# EAGLE board ws2812_Triangle_V04 (EAGLE 7.7.0)
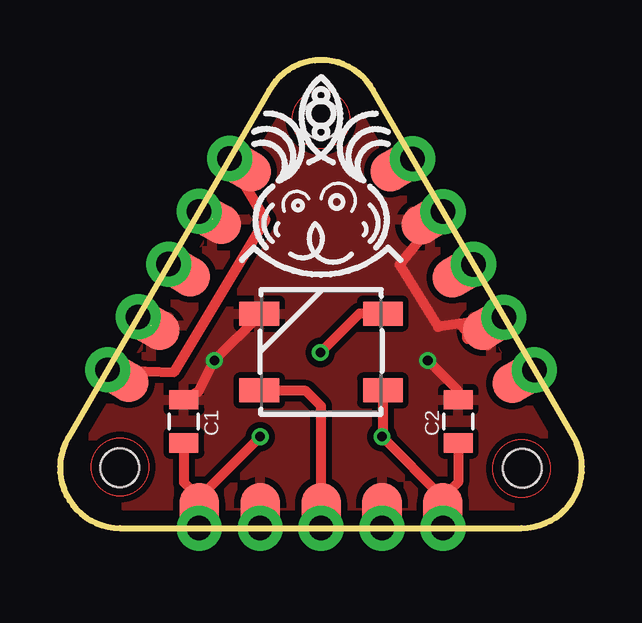
[diagram p0: board, top side]
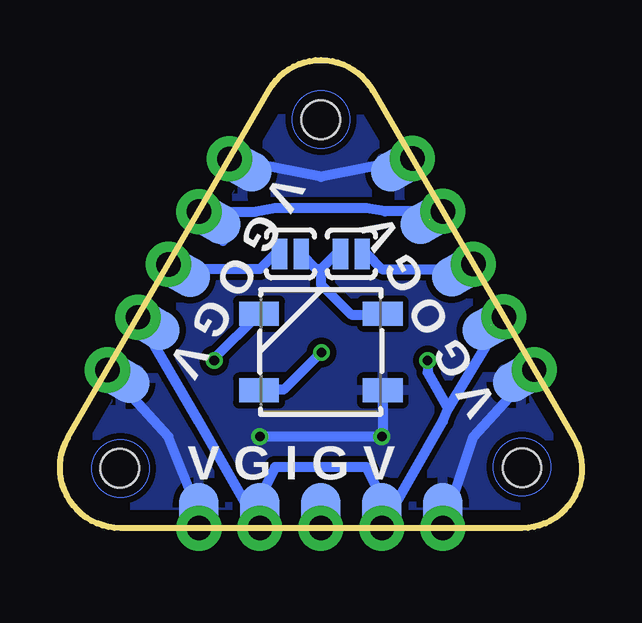
[diagram p1: board, bottom side, seen from below]

Size 21.75 x 19.5 mm. Coordinates in mm from the lower left corner, seen from the top.
Outline: 2.5,0 19.23,0 arc120 21.42,3.76 13.04,18.26 arc121 8.72,18.24 0.34,3.76 arc120 2.5,0
Copper layers (1*16): Top 0.035mm / dielectric 1.5mm / Bottom 0.035mm
Design rules "SeeedStudio_2layer_DRU_no_angle_20140221": minimum track width 6mil, minimum drill 12mil, track to track 6mil, track to pad 6mil, pad to pad 6mil, via to via 6mil, smd to smd 0mil, copper to edge 10mil, drill to drill 10mil, minimum pad ring 10mil, minimum via ring 6mil, stop-mask expansion 2mil, vias tented up to drill 100mil, thermal gap 10mil
Holes 1.6 mm at 2.5,2.51 10.88,17.02 19.26,2.49

## Footprints (pad centres in the part's own frame; a part is rotated, then mirrored left to right if it is on the bottom)
0805 = smd 0.8 x 1.2: 1 -0.9,0; 2 0.9,0
WS2812B = smd 1.651 x 1: 1 -2.577,1.6; 2 -2.577,-1.6; 3 2.577,-1.6; 4 2.577,1.6
1X05_NO_SILK = drill 1.016 pad 1.88: 1 0,0; 2 2.54,0; 3 5.08,0; 4 7.62,0; 5 10.16,0
PAD-JUMPER-2-NO_YES_SILK = smd 0.635 x 1.27: 1 -0.45,0; 2 0.45,0
SMD_PTH_1.65 = smd 1.65 x 2.5: P$1 0,0.635

## Placement (x,y rotation side)
C1  0.1uF  [0805]  5.16,4.45 270 top
C2  0.1uF  [0805]  16.59,4.45 270 top
D1  [WS2812B]  10.88,7.34 180 top
D2  [WS2812B]  10.88,7.34 180 bottom
J1  [1X05_NO_SILK]  7.07,15.4 240 top
J2  [1X05_NO_SILK]  19.77,6.59 120 top
J3  [1X05_NO_SILK]  5.8,0 0 top
JP1  JUMPER-PAD-2-NOYES_SILK  [PAD-JUMPER-2-NO_YES_SILK]  9.61,11.43 0 bottom
JP2  JUMPER-PAD-2-NOYES_SILK  [PAD-JUMPER-2-NO_YES_SILK]  12.15,11.43 180 bottom
U$1  SMD_1.65  [SMD_PTH_1.65]  10.88,0 0 bottom
U$2  SMD_1.65  [SMD_PTH_1.65]  4.51,11 120 bottom
U$3  SMD_1.65  [SMD_PTH_1.65]  17.25,10.98 240 bottom
U$4  SMD_1.65  [SMD_PTH_1.65]  8.34,0 0 bottom
U$5  SMD_1.65  [SMD_PTH_1.65]  13.42,0 0 bottom
U$6  SMD_1.65  [SMD_PTH_1.65]  3.23,8.77 120 bottom
U$7  SMD_1.65  [SMD_PTH_1.65]  5.81,13.18 120 bottom
U$8  SMD_1.65  [SMD_PTH_1.65]  18.51,8.78 240 bottom
U$9  SMD_1.65  [SMD_PTH_1.65]  15.97,13.18 240 bottom
U$10  SMD_1.65  [SMD_PTH_1.65]  15.96,0 0 bottom
U$11  SMD_1.65  [SMD_PTH_1.65]  5.8,0 0 bottom
U$12  SMD_1.65  [SMD_PTH_1.65]  7.04,15.38 120 bottom
U$13  SMD_1.65  [SMD_PTH_1.65]  1.97,6.61 120 bottom
U$14  SMD_1.65  [SMD_PTH_1.65]  19.76,6.57 240 bottom
U$15  SMD_1.65  [SMD_PTH_1.65]  14.68,15.37 240 bottom
U$16  SMD_1.65  [SMD_PTH_1.65]  8.34,0 0 top
U$17  SMD_1.65  [SMD_PTH_1.65]  13.42,0 0 top
U$18  SMD_1.65  [SMD_PTH_1.65]  18.53,8.79 120 top
U$19  SMD_1.65  [SMD_PTH_1.65]  19.76,6.56 120 top
U$20  SMD_1.65  [SMD_PTH_1.65]  5.8,0 0 top
U$21  SMD_1.65  [SMD_PTH_1.65]  15.96,0 0 top
U$22  SMD_1.65  [SMD_PTH_1.65]  14.68,15.39 120 top
U$23  SMD_1.65  [SMD_PTH_1.65]  7.05,15.38 240 top
U$24  SMD_1.65  [SMD_PTH_1.65]  1.95,6.61 240 top
U$25  SMD_1.65  [SMD_PTH_1.65]  15.97,13.18 120 top
U$26  SMD_1.65  [SMD_PTH_1.65]  5.79,13.19 240 top
U$27  SMD_1.65  [SMD_PTH_1.65]  3.25,8.77 240 top
U$28  SMD_1.65  [SMD_PTH_1.65]  4.51,11.01 240 top
U$29  SMD_1.65  [SMD_PTH_1.65]  17.27,10.97 120 top
U$30  SMD_1.65  [SMD_PTH_1.65]  10.88,0 0 top

## Library data of the parts
C1 C2 = SparkFun-Capacitors
D1 D2 = SparkFun-LED; PROD_ID: DIO-12503
J1-J3 = SparkFun-Connectors
JP1 JP2 = SparkFun-Passives
U$1-U$30 = Modified_wirepad

## Nets
D_1-2: D1.2 D2.4
DIN: D1.4 J3.3 U$1.P$1 U$30.P$1
DOUT: D2.2 JP1.1 JP2.1
GND: C1.1 C2.1 D1.3 D2.3 J1.2 J1.4 J2.2 J2.4 J3.2 J3.4 U$4.P$1 U$5.P$1 U$6.P$1 U$7.P$1 U$8.P$1 U$9.P$1 U$16.P$1 U$17.P$1 U$18.P$1 U$25.P$1 U$26.P$1 U$27.P$1
N$1: J2.3 JP2.2 U$3.P$1 U$29.P$1
N$2: J1.3 JP1.2 U$2.P$1 U$28.P$1
VIN: C1.2 C2.2 D1.1 D2.1 J1.1 J1.5 J2.1 J2.5 J3.1 J3.5 U$10.P$1 U$11.P$1 U$12.P$1 U$13.P$1 U$14.P$1 U$15.P$1 U$19.P$1 U$20.P$1 U$21.P$1 U$22.P$1 U$23.P$1 U$24.P$1

## Tracks (layer width: path | path; a pad name or v marks a point on that pad's centre or on a via)
D_1-2  (via drill 0.4)
  Top 0.406: D1.2 12.48,8.94 v10.85,7.32
  Bottom 0.406: v10.85,7.32 10.88,7.32 12.43,5.77 13.43,5.77 D2.4
DIN
  Top 0.406: D1.4 8.33,5.71 10.24,5.71 10.88,5.08 U$30.P$1 J3.3 10.88,-0.25
  Bottom 0.406: U$30.P$1 J3.3
DOUT
  Bottom 0.406: JP1.1 10.24,11.43 10.88,10.79 | 10.88,10.79 10.88,10.16 9.61,8.89 8.35,8.89 D2.2 | 10.88,10.79 11.06,10.79 JP2.1
GND  (via drill 0.4)  (5 unrouted)
  Top 0.406: 16.98,8.56 J2.2 U$8.P$1 | 16.98,8.56 16.63,8.51 | 16.63,8.51 15.75,8.38 14.15,10.97 J2.4 | C1.1 5.8,5.71 v6.43,6.99 8.3,8.85 D1.3 | C2.1 16.59,5.71 v15.32,6.99 | U$16.P$1 8.39,0.64 8.39,1.37 8.34,1.37 U$16.P$1 | U$16.P$1 7.83,0.64 7.83,0 J3.2 U$16.P$1 | 13.42,1.27 U$17.P$1 J3.4 | J1.4 U$27.P$1 | J1.2 U$26.P$1 | U$18.P$1 U$8.P$1 | U$8.P$1 18.02,7.96 18.5,8.64 17.48,8.64 | 17.48,8.64 17.23,8.64 17.48,8.38 | 17.48,8.64 17.48,8.38 | 17.48,8.38 17.48,8.13 | 17.48,8.13 17.48,7.87 | 17.48,7.87 17.99,7.87 U$8.P$1 | U$8.P$1 17.48,8.13 | U$8.P$1 16.98,8.56 | U$8.P$1 17.48,8.38 | U$8.P$1 17.81,7.62 17.48,7.87 | U$8.P$1 17.56,8.46 16.97,7.87 16.97,8.16 16.63,8.51
  Bottom 0.406: J1.2 8.2,13.2 8.97,13.34 12.78,13.34 13.57,13.19 J2.4 U$25.P$1 | J2.2 15.96,4.45 J3.4 13.42,1.27 12.78,2.54 8.97,2.54 8.34,1.27 J3.2 5.8,4.45 5.56,4.98 | 5.56,4.98 J1.4 | v6.43,6.99 6.43,6.48 5.56,4.98 | v15.32,6.99 15.32,7.07 D2.3 | U$25.P$1 | U$25.P$1 15.29,12.37 14.96,11.97 U$25.P$1
  pour Top (isolate 0.254): 2.62,0.95 19.13,0.95 20.4,3.49 12.46,17.14 9.29,17.14 1.35,3.81
N$1
  Top 0.406: U$29.P$1 J2.3
  Bottom 0.406: JP2.2 12.78,11.43 13.42,10.79 17.04,10.79 J2.3 17.23,10.66 U$3.P$1
N$2
  Top 0.406: U$28.P$1 5.29,10.16 5.54,10.79 J1.3
  Bottom 0.406: JP1.2 8.97,11.43 8.34,10.79 4.73,10.79 J1.3 4.53,10.69 U$2.P$1
VIN  (via drill 0.4)  (1 unrouted)
  Top 0.406: J1.5 3.02,6.56 | 3.02,6.56 4.76,6.5 8.57,12.85 7.62,14.46 | 7.62,14.46 J1.1 | 5.8,1.27 v8.34,3.81 | 15.96,1.27 v13.42,3.81 13.45,3.77 D1.1 | 15.96,1.27 U$21.P$1 J3.5 | 5.8,1.27 U$20.P$1 J3.1 | C1.2 5.16,1.91 5.8,1.27 | C2.2 16.59,1.91 15.96,1.27 | U$24.P$1 3.02,6.56 | 7.07,15.49 6.81,15.24 U$23.P$1 7.07,15.49 | 7.07,15.49 8.08,14.73 7.62,14.46 | U$22.P$1 13.67,15.4 U$15.P$1 | U$15.P$1 U$22.P$1 | U$15.P$1 13.67,14.73 13.67,14.99 U$22.P$1 | U$15.P$1 14.69,15.49 14.94,14.99 J2.5 | 19.65,6.53 U$19.P$1 19.57,6.6 | 19.65,6.53 19.77,6.6 | 19.77,6.6 19.57,6.6 | 19.57,6.6 19.26,6.6 18.5,5.84 18.75,5.84 | 18.75,5.84 18.96,5.84 19.65,6.53 | 19.77,6.6 19.77,6.35 19.01,5.59 18.75,5.84
  Bottom 0.406: J3.5 U$21.P$1 17.23,3.81 J2.1 19.77,6.25 U$14.P$1 19.77,6.6 U$19.P$1 | v13.42,3.81 v8.34,3.81 8.3,3.77 D2.1 | U$15.P$1 14.69,15.06 J2.5 10.87,14.64 J1.1 7.07,15.06 U$12.P$1 U$23.P$1 | U$13.P$1 1.99,6.29 J1.5 4.53,3.81 J3.1 U$20.P$1 | 7.09,15.49 7.6,15.49 U$23.P$1 | U$23.P$1 7.07,15.06 7.07,15.34 | 7.07,15.37 7.07,15.49 7.09,15.49 | 7.09,15.49 7.09,15.34 7.07,15.34 | 7.07,15.34 7.07,15.37 | 7.07,15.37 7.04,15.37 7.04,15.57 6.92,15.57 6.92,15.85
  pour Bottom (isolate 0.254): 2.62,0.95 19.13,0.95 20.4,3.49 12.46,17.14 9.29,17.14 1.35,3.81
(copper drawn outside any net)
  shapes: Bottom circle x3, Top circle x3

## Text on the board
bPlace: V G O G V | V G O G V | V G I G V